# Altium PCB DUTBoard_DONT_TOUCH.PcbDoc (part 4 of 5)
Units mil, origin at the board's own origin, x right, y up, seen from the top; angles counter-clockwise.
Board outline 5475 x 5475 mil, 4 copper layers (Top Layer, Mid-Layer 1, Mid-Layer 2, Bottom Layer); 57 components, 471 nets, 1641 pads, 1070 vias.
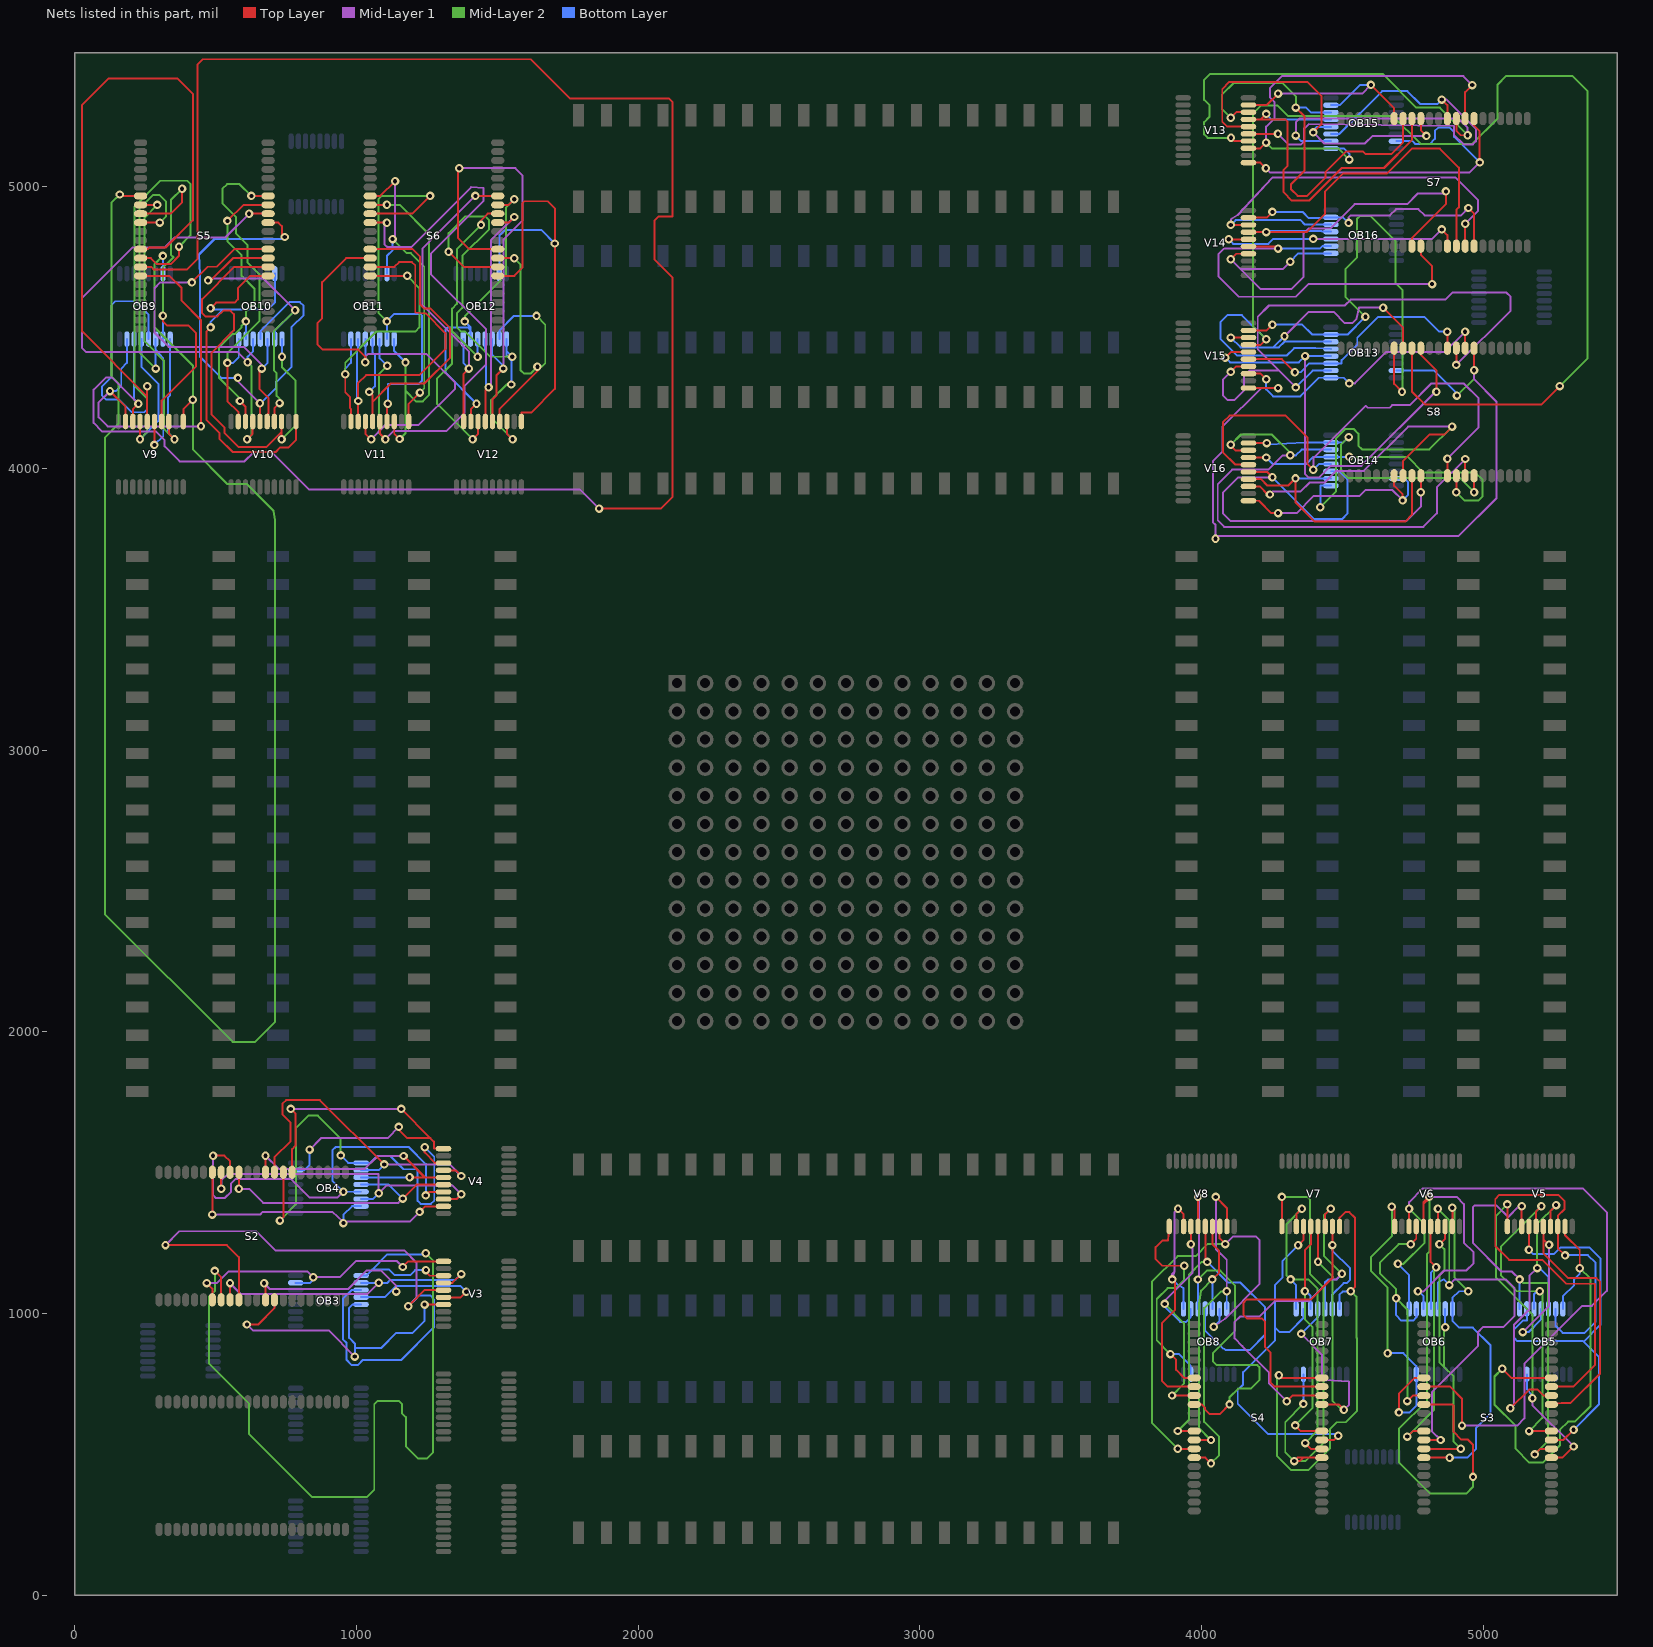
[diagram p6: the nets of this part, all layers, seen from the top]

## Via types
v1: diameter 30, hole 15, Top Layer to Bottom Layer, 1070 vias

## Nets (pads, with @x,y where several pads share a name; then routed paths per layer and width w, separated by ;. In a path a pad name is that pad's centre, name@x,y a point inside that pad or via, vN(x,y) a via of type N, cw(c..) or ccw(c..) an arc to the next point about the centre after c; other vN are vias at no path point) (continued)
OB_D_B2: OB16.D2 S7.DATA2 V14.OVL2 | length 1701.9
  Top Layer w7: v1(4103,4742) 4122.61,4761.61 V14.OVL2@4166.14,4761.61 ; S7.DATA2@4746.26,4788.62 4746.26,4816.76 4867,4937.5 v1(4867,4983)
  Mid-Layer 1 w7: v1(4103,4742) 4138,4707 ; v1(4314,4733.5) 4287.5,4707 4138,4707 ; v1(4867,4983) 4859,4975 4766,4975 4729,4938 4543,4938 4456,4851 4379,4851 4361,4833 4361,4678.5 4318.5,4636 4209,4636 4138,4707
  Bottom Layer w7: v1(4314,4733.5) 4343.52,4763.02 OB16.D2@4458.86,4763.02
OB_D_B3: OB16.D3 S7.DATA3 V14.OVL3 | length 1557
  Top Layer w7: V14.OVL3@4166.14,4787.2 4263.82,4787.2 v1(4271,4780.03) ; S7.DATA3@4777.76,4788.62 4777.76,4757.45 4817.76,4717.45 v1(4817.76,4654)
  Mid-Layer 1 w7: v1(4271,4780.03) 4079.03,4780.03 4059,4760 4059,4681 4131,4609 4334,4609 4379,4654 v1(4817.76,4654)
  Bottom Layer w7: v1(4271,4780.03) 4419.41,4780.03 4428,4788.61 OB16.D3@4458.86,4788.61
OB_D_B4: OB16.D4 S7.DATA4 V14.OVL4 | length 984.3
  Top Layer w7: v1(4096,4812.8) V14.OVL4@4166.14,4812.8 ; v1(4852.24,4848) 4872.24,4828 S7.DATA4@4872.24,4788.62
  Mid-Layer 1 w7: v1(4396.3,4814.2) 4818.45,4814.2 v1(4852.24,4848)
  Bottom Layer w7: v1(4096,4812.8) 4111.8,4797 4237,4797 4254.2,4814.2 v1(4396.3,4814.2) OB16.D4@4458.86,4814.2
OB_D_B5: OB16.D5 S7.DATA5 V14.OVL5 | length 1460.2
  Top Layer w7: V14.OVL5@4166.14,4838.39 v1(4229,4838.39) 4372.89,4838.39 4438,4903.5 4438,4983 4501.19,5046.19 4657.19,5046.19 4746,5135 4845.69,5135 4913,5067.69 4913,4926.45 4903.74,4917.19 S7.DATA5@4903.74,4788.62
  Bottom Layer w7: v1(4229,4838.39) 4233.61,4843 4424.5,4843 4427.71,4839.8 OB16.D5@4458.86,4839.8
OB_D_B6: OB16.D6 S7.DATA6 V14.OVL6 | length 1605
  Top Layer w7: v1(4103.58,4863.98) V14.OVL6@4166.14,4863.98 ; S7.DATA6@4935.24,4788.62 v1(4935.24,4868)
  Mid-Layer 1 w7: v1(4103.58,4863.98) 4103.58,4883.98 4128.92,4900 4251.11,5031.5 4901.26,5031.5 4980,4952.76 4980,4912.76 v1(4935.24,4868)
  Bottom Layer w7: v1(4103.58,4863.98) 4120.61,4881 4350.98,4881 4366.59,4865.39 OB16.D6@4458.86,4865.39
OB_D_B7: OB16.D7 S7.DATA7 V14.OVL7 | length 1003.3
  Top Layer w7: V14.OVL7@4166.14,4889.57 4230.57,4889.57 v1(4251,4910) ; v1(4946.73,4924) 4966.73,4904 S7.DATA7@4966.73,4788.62
  Mid-Layer 1 w7: v1(4521.42,4870.98) 4521.42,4890.98 4528.44,4898 4668,4898 4690,4920 4769.5,4920 4791.5,4898 4920.73,4898 v1(4946.73,4924)
  Bottom Layer w7: v1(4251,4910) 4357.8,4910 4379.8,4888 4424.73,4888 4427.71,4890.98 OB16.D7@4458.86,4890.98 4501.42,4890.98 v1(4521.42,4870.98)
OB_D_B8: OB15.D0 S7.DATA8 V13.OVL0 | length 1415
  Top Layer w7: V13.OVL0@4166.14,5084.84 4208,5084.84 v1(4227.84,5065) ; S7.DATA8@4966.73,5241.38 4966.73,5216.27 4986.73,5196.27 v1(4986.73,5085.73)
  Mid-Layer 1 w7: v1(4227.84,5065) 4242.34,5050.5 4951.5,5050.5 v1(4986.73,5085.73)
  Bottom Layer w7: OB15.D0@4691.14,5161.02 4749,5161.02 4759.02,5151 4809.5,5151 4828,5169.5 4828,5197.5 4840,5209.5 4880,5209.5 4895.9,5193.6 4895.9,5176.56 v1(4986.73,5085.73)
OB_D_B9: OB15.D1 S7.DATA9 V13.OVL1 | length 1575.6
  Top Layer w7: V13.OVL1@4166.14,5136.02 4208.7,5136.02 v1(4228.7,5156.02) ; S7.DATA9@4935.24,5241.38 4935.24,5335.51 v1(4960.24,5360.51)
  Mid-Layer 1 w7: v1(4228.7,5156.02) 4228.7,5212.7 4259,5243 4259,5300.07 4242,5317.07 4242,5349.48 4284.52,5392 4928.74,5392 v1(4960.24,5360.51)
  Mid-Layer 2 w7: v1(4228.7,5156.02) 4248.7,5136.02 4483.98,5136.02 v1(4524,5096)
  Bottom Layer w7: OB15.D1@4458.86,5135.43 4504.57,5135.43 4524,5116 v1(4524,5096)
OB_D_B10: OB15.D2 S7.DATA10 V13.OVL2 | length 2334.1
  Top Layer w7: v1(4104,5173) 4115.39,5161.61 V13.OVL2@4166.14,5161.61 ; S7.DATA10@4903.74,5241.38 4903.74,5198.52 4920,5182.26 v1(4943.74,5182.26)
  Mid-Layer 1 w7: v1(4334,5181) 4334,5228.02 4346.98,5241 4911.57,5241 4943.74,5208.83 v1(4943.74,5182.26)
  Mid-Layer 2 w7: v1(4104,5173) 4021,5173 4009,5185 4009,5229 4027,5247 4027,5290 4009,5308 4009,5379 4030,5400 4642.75,5400 4762.25,5280.5 4845.5,5280.5 v1(4943.74,5182.26)
  Bottom Layer w7: v1(4334,5181) 4353.98,5161.02 OB15.D2@4458.86,5161.02
OB_D_B11: OB15.D3 S7.DATA11 V13.OVL3 | length 1694.1
  Top Layer w7: V13.OVL3@4166.14,5187.2 v1(4270.8,5187.2) ; v1(4852.24,5309) 4872.24,5289 S7.DATA11@4872.24,5241.38
  Mid-Layer 1 w7: v1(4270.8,5187.2) 4307.85,5150.15 4353.15,5150.15 4364,5161 4364,5206 4380,5222 4895.5,5215.5 4895.5,5184.26 4929.76,5150 4962.24,5150 4973,5160.76 4973,5205.9 4869.9,5309 v1(4852.24,5309)
  Bottom Layer w7: OB15.D3@4458.86,5186.61 4487.98,5186.61 4640.37,5339 4730,5339 4775,5294 4837.24,5294 v1(4852.24,5309)
OB_D_B12: OB15.D4 S7.DATA12 V13.OVL4 | length 1315.6
  Top Layer w7: V13.OVL4@4166.14,5212.8 4090,5212.8 4073,5229.8 4073,5346.31 4098.58,5371.89 4375.11,5371.89 4425,5322 4425,5220.91 v1(4396.3,5192.2) ; S7.DATA12@4777.76,5241.38 4777.76,5200 v1(4797.76,5180)
  Mid-Layer 1 w7: v1(4396.3,5192.2) 4435.5,5153 4579.5,5153 4606.5,5180 v1(4797.76,5180)
  Bottom Layer w7: v1(4396.3,5192.2) 4396.3,5200 4408.5,5212.2 OB15.D4@4458.86,5212.2
OB_D_B13: OB15.D5 S7.DATA13 V13.OVL5 | length 1297.9
  Top Layer w7: V13.OVL5@4166.14,5238.39 4209.39,5238.39 ; v1(4229,5258) 4209.39,5238.39 ; S7.DATA13@4746.26,5241.38 4746.26,5165.07 4647.19,5066 4496.96,5066 4380.96,4950 4320.5,4950 4290.5,4980 4290.5,5059.42 4305,5073.92 4305,5230 4296.61,5238.39 4209.39,5238.39
  Bottom Layer w7: v1(4229,5258) 4249.2,5237.8 OB15.D5@4458.86,5237.8
OB_D_B14: OB15.D6 S7.DATA14 V13.OVL6 | length 1547.8
  Top Layer w7: v1(4103,5244) 4122.98,5263.98 V13.OVL6@4166.14,5263.98 ; v1(4334,5280.39) 4365,5249.39 4365,5056 4317,5008 4317,4990.5 4340.5,4967 4373.92,4967 4439.75,5032.84 4439.75,5052.06 4512.69,5125 4572.5,5125 4582.5,5115 4672.15,5115 4714.76,5157.61 S7.DATA14@4714.76,5241.38
  Mid-Layer 2 w7: v1(4103,5244) 4073,5274 4073,5327 4113,5367 4287,5367 4334,5320 v1(4334,5280.39)
  Bottom Layer w7: v1(4334,5280.39) 4334.39,5280 4371,5280 4387.61,5263.39 OB15.D6@4458.86,5263.39
OB_D_B15: OB15.D7 S7.DATA15 V13.OVL7 | length 789.9
  Top Layer w7: V13.OVL7@4166.14,5289.57 4230.57,5289.57 v1(4271,5330) ; v1(4600.87,5361) 4683.27,5278.6 S7.DATA15@4683.27,5241.38
  Mid-Layer 1 w7: v1(4271,5330) 4569.86,5330 v1(4600.87,5361)
  Bottom Layer w7: OB15.D7@4458.86,5288.98 4490.48,5288.98 4562.5,5361 v1(4600.87,5361)
OB_D_B16: OB14.D0 S8.DATA0 V16.OVL0 | length 835.2
  Top Layer w7: V16.OVL0@4166.14,3884.84 4203.52,3884.84 4247.37,3841 v1(4271,3841) ; S8.DATA0@4683.27,3973.62 4683.27,3937.5 4713,3907.77 v1(4713,3886)
  Mid-Layer 1 w7: v1(4271,3841) 4336.71,3841 4396.71,3901 4560,3901 4582.5,3923.5 4675.5,3923.5 v1(4713,3886)
  Bottom Layer w7: OB14.D0@4691.14,3964.02 4720,3964.02 4733,3951.02 4733,3906 v1(4713,3886)
OB_D_B17: OB14.D1 S8.DATA1 V16.OVL1 | length 2009
  Top Layer w7: V16.OVL1@4166.14,3936.02 4205.5,3936.02 4234.52,3907 v1(4242.02,3907) ; S8.DATA1@4714.76,3973.62 4714.76,4026.76 4807.74,4119.74 4860.74,4119.74 v1(4889,4148)
  Mid-Layer 1 w7: v1(4242.02,3907) 4252.02,3917 4350.3,3917 4383,3949.7 4437,3949.7 4478.3,3991 4576,3991 4733,4148 v1(4889,4148)
  Mid-Layer 2 w7: v1(4421,3862) 4477,3918 4477,4106.5 4510,4139.5 4540,4139.5 4556,4123.5 4556,4080 4569,4067 4808,4067 v1(4889,4148)
  Bottom Layer w7: v1(4421,3862) 4421,3938.43 OB14.D1@4458.86,3938.43
OB_D_B18: OB14.D2 S8.DATA2 V16.OVL2 | length 986.7
  Top Layer w7: V16.OVL2@4166.14,3961.61 4210.89,3961.61 4233.5,3939 4307.98,3939 v1(4333,3964.02) 4333,3880 4402,3811 4722,3811 4746.26,3835.26 S8.DATA2@4746.26,3973.62
  Bottom Layer w7: v1(4333,3964.02) OB14.D2@4458.86,3964.02
OB_D_B19: OB14.D3 S8.DATA3 V16.OVL3 | length 1738.4
  Top Layer w7: V16.OVL3@4166.14,3987.2 4231.8,3987.2 v1(4251,3968) ; v1(4777.76,3915) S8.DATA3@4777.76,3973.62
  Mid-Layer 1 w7: v1(4251,3968) 4129,3968 4075,3914 4075,3840 4102.5,3812.5 4726.5,3812.5 4777.76,3863.76 v1(4777.76,3915)
  Bottom Layer w7: v1(4251,3968) 4399,3820 4498,3820 4518,3840 4518,3960 4488.39,3989.61 OB14.D3@4458.86,3989.61
OB_D_B20: OB14.D4 S8.DATA4 V16.OVL4 | length 1864.4
  Top Layer w7: V16.OVL4@4166.14,4012.8 4120,4012.8 4075,4057.8 4075,4163 4099,4187 4298,4187 4375,4110 4375,4016.5 v1(4396.3,3995.2) ; S8.DATA4@4872.24,3973.62 v1(4872.24,4034.24)
  Mid-Layer 1 w7: v1(4396.3,3995.2) 4396.3,4035.2 4583.09,4222 4590.1,4215 4667.1,4215 4676.1,4224 4738.52,4224 4815.52,4301 4930,4301 4983,4248 4983,4145 v1(4872.24,4034.24)
  Bottom Layer w7: OB14.D4@4458.86,4015.2 4416.3,4015.2 ; 4416.3,4015.2 v1(4396.3,3995.2) 4416.3,4015.2
OB_D_B21: OB14.D5 S8.DATA5 V16.OVL5 | length 1113.2
  Top Layer w7: V16.OVL5@4166.14,4038.39 v1(4229,4038.39) ; v1(4903.74,3915) S8.DATA5@4903.74,3973.62
  Mid-Layer 2 w7: v1(4523.74,4040.8) 4730.77,4040.8 4786.57,3985 4971,3985 4997,3959 4997,3901 4981,3885 4933.74,3885 v1(4903.74,3915)
  Bottom Layer w7: v1(4229,4038.39) 4251.39,4016 4372,4016 4396.8,4040.8 OB14.D5@4458.86,4040.8 v1(4523.74,4040.8)
OB_D_B22: OB14.D6 S8.DATA6 V16.OVL6 | length 2017.1
  Top Layer w7: v1(4103.58,4083.98) 4103.58,4080 4119.61,4063.98 V16.OVL6@4166.14,4063.98 ; S8.DATA6@4935.24,3973.62 v1(4935.24,4033)
  Mid-Layer 1 w7: v1(4314,4046) 4288,4046 4237,3995 4108.31,3995 4057,3943.69 4057,3815 4080,3792 4787,3792 4835,3840 4835,3932.76 v1(4935.24,4033)
  Mid-Layer 2 w7: v1(4103.58,4083.98) 4139.61,4120 4249,4120 4314,4055 v1(4314,4046)
  Bottom Layer w7: v1(4314,4046) 4334,4046 4354.39,4066.39 OB14.D6@4458.86,4066.39
OB_D_B23: OB14.D7 S8.DATA7 V16.OVL7 | length 1060.5
  Top Layer w7: V16.OVL7@4166.14,4089.57 v1(4231,4089.57) ; S8.DATA7@4966.73,3973.62 4966.73,3915.27 v1(4967,3915)
  Mid-Layer 2 w7: v1(4522,4111) 4494,4083 4494,3992 4521,3965 4917,3965 v1(4967,3915)
  Bottom Layer w7: v1(4231,4089.57) 4236.57,4084 4366.98,4091.98 OB14.D7@4458.86,4091.98 4502.98,4091.98 v1(4522,4111)
OB_D_B24: OB13.D0 S8.DATA8 V15.OVL0 | length 2768
  Top Layer w7: V15.OVL0@4166.14,4284.84 v1(4271.02,4284.84) ; v1(4966.73,4347.76) S8.DATA8@4966.73,4426.38
  Mid-Layer 1 w7: v1(4271.02,4284.84) 4210.84,4284.84 4073,4147 4073,4058 4040,4025 4040,3807.96 4049,3798.96 v1(4049,3750) 4059,3760 4912,3760 5046.5,3894.5 5046.5,4236.5 4966.73,4316.27 v1(4966.73,4347.76)
  Mid-Layer 2 w7: v1(4906,4258) 4966.73,4318.73 v1(4966.73,4347.76)
  Bottom Layer w7: OB13.D0@4691.14,4347.02 4824.98,4347.02 4906,4266 v1(4906,4258)
OB_D_B25: OB13.D1 S8.DATA9 V15.OVL1 | length 993.9
  Top Layer w7: V15.OVL1@4166.14,4336.02 4208.98,4336.02 v1(4229,4316) ; v1(4935,4485) 4935.24,4484.76 S8.DATA9@4935.24,4426.38
  Mid-Layer 1 w7: v1(4523.84,4301.43) 4543.84,4301.43 4655.41,4413 4863,4413 v1(4935,4485)
  Bottom Layer w7: v1(4229,4316) 4229,4280 4253.75,4255.25 4350,4255.25 4416.18,4321.43 OB13.D1@4458.86,4321.43 4503.84,4321.43 v1(4523.84,4301.43)
OB_D_B26: OB13.D2 S8.DATA10 V15.OVL2 | length 2308.7
  Top Layer w7: v1(4103,4342) 4122.61,4361.61 V15.OVL2@4166.14,4361.61 ; S8.DATA10@4903.74,4426.38 4903.74,4367.26 v1(4904,4367)
  Mid-Layer 1 w7: v1(4103,4342) 4075.08,4314.08 4075.08,4258.63 4091.78,4241.93 4115.39,4241.93 4151,4277.55 4151,4328 4171,4348 4273,4348 v1(4334,4287) 4199,4422 4199,4538 4239,4578 4508,4578 4528.5,4598.5 4864.48,4598.5 4889.98,4624 5082,4624 5097,4609 5097,4560 v1(4904,4367)
  Bottom Layer w7: v1(4334,4287) 4394.02,4347.02 OB13.D2@4458.86,4347.02
OB_D_B27: OB13.D3 S8.DATA11 V15.OVL3 | length 907.8
  Top Layer w7: V15.OVL3@4166.14,4387.2 4284.8,4387.2 v1(4331,4341) ; v1(4872,4485) 4872.24,4484.76 S8.DATA11@4872.24,4426.38
  Bottom Layer w7: v1(4331,4341) 4350.93,4341 4382.55,4372.61 OB13.D3@4458.86,4372.61 4497,4372.61 4497,4384 4552.18,4439.18 4552.18,4463.18 4626.76,4537.76 4790.28,4537.76 4843.04,4485 v1(4872,4485)
OB_D_B28: OB13.D4 S8.DATA12 V15.OVL4 | length 1675.1
  Top Layer w7: v1(4084,4393) 4103.8,4412.8 V15.OVL4@4166.14,4412.8 ; S8.DATA12@4777.76,4426.38 4777.76,4402.74 4833.02,4347.48 v1(4833.02,4272)
  Mid-Layer 1 w7: v1(4367,4398.2) 4367,3979.7 4380,3966.7 4415.47,3966.7 4457.76,4009 4567,4009 4830,4272 v1(4833.02,4272)
  Bottom Layer w7: v1(4084,4393) 4101,4376 4344.8,4376 v1(4367,4398.2) OB13.D4@4458.86,4398.2
OB_D_B29: OB13.D5 S8.DATA13 V15.OVL5 | length 4848.7
  Top Layer w7: V15.OVL5@4166.14,4438.39 4209.39,4438.39 v1(4229,4458) ; S8.DATA13@4746.26,4426.38 4746.26,4272.74 4793,4226 5205,4226 v1(5271,4292)
  Mid-Layer 2 w7: v1(4229,4458) 4182,4505 4182,5259 4211,5288 4269,5288 4307,5250 4679,5250 4777.5,5151.5 4960,5151.5 5050,5241.5 5050,5362 5080,5392 5317,5392 5370,5339 5370,4391 v1(5271,4292)
  Bottom Layer w7: v1(4229,4458) 4143,4544 4091.5,4544 4067.5,4520 4067.5,4458.5 4126,4400 4301.09,4400 4328.09,4427 4404.5,4427 OB13.D5@4458.86,4423.8
OB_D_B30: OB13.D6 S8.DATA14 V15.OVL6 | length 1110.7
  Top Layer w7: v1(4103,4464) V15.OVL6@4166.14,4463.98 ; v1(4644,4570) 4714.76,4499.24 S8.DATA14@4714.76,4426.38
  Mid-Layer 1 w7: v1(4294,4469) 4380,4555 4468,4555 4507.26,4515.74 4534.74,4515.74 4550,4531 4559,4570 v1(4644,4570)
  Bottom Layer w7: v1(4103,4464) 4138,4429 4254,4429 ; v1(4294,4469) 4254,4429 ; OB13.D6@4458.86,4449.39 4294,4449.39 4273.61,4429 4254,4429
OB_D_B31: OB13.D7 S8.DATA15 V15.OVL7 | length 1746.6
  Top Layer w7: V15.OVL7@4166.14,4489.57 4230.57,4489.57 v1(4251,4510) ; S8.DATA15@4683.27,4426.38 4683.27,4299.73 v1(4711,4272)
  Mid-Layer 2 w7: v1(4581,4538) 4511,4608 4511,4708 4551,4748 4551,4885 4561,4895 4600,4895 4688.5,4806.5 4688.5,4657.5 4713.5,4632.5 4713.5,4274.5 v1(4711,4272)
  Bottom Layer w7: v1(4251,4510) 4356.91,4510 4391.93,4474.98 OB13.D7@4458.86,4474.98 4517.98,4474.98 v1(4581,4538)
OB_D_B32: OB12.D0 S6.DATA0 V12.OVL0 | length 1642.6
  Top Layer w7: S6.DATA0@1501.38,4683.27 1560,4683.27 1590,4713.27 1590,4942 1596,4948 1679,4948 1704,4923 v1(1704,4798) 1704,4282.02 1620,4198.02 1585.16,4198.02 V12.OVL0@1585.16,4166.14
  Bottom Layer w7: OB12.D0@1506.98,4691.14 1506.98,4824.98 1528,4846 1656,4846 v1(1704,4798)
OB_D_B33: OB12.D1 S6.DATA1 V12.OVL1 | length 1637.7
  Top Layer w7: v1(1327,4769) 1381.24,4714.76 S6.DATA1@1501.38,4714.76 ; V12.OVL1@1533.98,4166.14 1533.98,4123.07 v1(1554,4103.05)
  Mid-Layer 2 w7: v1(1327,4769) 1327,4835 1386,4894 1457,4894 1471,4880 1471,4848.83 1376,4753.83 1376,4569.8 1356.11,4549.92 1356.11,4500 1369.73,4486.39 1384.61,4486.39 1475,4396 1532.57,4396.3 v1(1552.57,4396.3) ; v1(1549.5,4297.57) 1532.57,4297.57 1478,4243 1478,4179.05 v1(1554,4103.05)
  Bottom Layer w7: OB12.D1@1532.57,4458.86 1532.57,4416.3 ; v1(1549.5,4297.57) 1549.5,4382.5 1532.57,4399.43 1532.57,4416.3 ; v1(1552.57,4396.3) 1532.57,4416.3
OB_D_B34: OB12.D2 S6.DATA2 V12.OVL2 | length 1186.4
  Top Layer w7: S6.DATA2@1501.38,4746.26 1559.74,4746.26 v1(1560,4746) ; V12.OVL2@1508.39,4166.14 1508.39,4211.07 1645,4347.68 v1@1645,4358
  Mid-Layer 2 w7: v1(1560,4746) 1582,4724 1582,4349 1595,4336 1617.59,4336 v1(1642.3,4360.7) 1658.02,4360.7 1670,4372.68 1670,4509.87 v1(1639,4540.87)
  Bottom Layer w7: OB12.D2@1506.98,4458.86 1506.98,4488.84 1559,4540.87 v1(1639,4540.87)
OB_D_B35: OB12.D3 S6.DATA3 V12.OVL3 | length 1682.5
  Top Layer w7: v1(1365,5065.36) 1360,5060.36 1360,4817.76 1400,4777.76 S6.DATA3@1501.38,4777.76 ; V12.OVL3@1482.8,4166.14 1482.8,4244.8 1497.5,4259.5 1497.5,4299.81 1497,4300.31 1497,4330 v1(1521,4354)
  Mid-Layer 1 w7: v1(1365,5065.36) 1563.64,5065.36 1590,5039 1590,4881 1521,4812 v1(1521,4354)
  Bottom Layer w7: OB12.D3@1481.39,4458.86 1481.39,4403.61 1521,4364 v1(1521,4354)
OB_D_B36: OB12.D4 S6.DATA4 V12.OVL4 | length 1011.6
  Top Layer w7: V12.OVL4@1457.2,4166.14 1457.2,4276.2 v1(1469,4288) ; S6.DATA4@1501.38,4872.24 1540.24,4872.24 v1(1560,4892)
  Mid-Layer 1 w7: v1(1469,4288) 1477,4296 1477,4809 v1(1560,4892)
  Bottom Layer w7: OB12.D4@1455.8,4458.86 1455.8,4414 1460,4409.8 1460,4297 v1(1469,4288)
OB_D_B37: OB12.D5 S6.DATA5 V12.OVL5 | length 1225.7
  Top Layer w7: v1(1412,4103) 1431.61,4122.61 V12.OVL5@1431.61,4166.14 ; v1(1442,4864) 1442,4880 1465.74,4903.74 S6.DATA5@1501.38,4903.74
  Mid-Layer 2 w7: v1(1412,4103) 1286,4229 1286,4319 1339.11,4372.11 1339.11,4486.79 ; v1(1429.9,4396) 1339.11,4486.79 ; v1(1442,4864) 1356,4778 1356,4583.8 1339.11,4566.92 1339.11,4486.79
  Bottom Layer w7: v1(1429.9,4396) 1430.2,4396.3 OB12.D5@1430.2,4458.86
OB_D_B38: OB12.D6 S6.DATA6 V12.OVL6 | length 1120
  Top Layer w7: V12.OVL6@1406.02,4166.14 1406.02,4209.02 v1(1426,4229) ; S6.DATA6@1501.38,4935.24 1540.24,4935.24 v1(1560,4955)
  Mid-Layer 2 w7: v1(1384.61,4521.42) 1384.61,4540 1531,4686.39 1531,4926 v1(1560,4955)
  Bottom Layer w7: v1(1384.61,4521.42) 1404.61,4501.42 1404.61,4490 ; OB12.D6@1404.61,4458.86 1404.61,4490 ; v1(1426,4229) 1316,4339 1316,4492.61 1323.39,4500 1394.61,4500 1404.61,4490
OB_D_B39: OB12.D7 S6.DATA7 V12.OVL7 | length 1147.1
  Top Layer w7: V12.OVL7@1380.43,4166.14 1380.43,4335.39 v1(1399.02,4353.98) ; v1(1422,4966.73) S6.DATA7@1501.38,4966.73
  Mid-Layer 1 w7: v1(1399.02,4353.98) 1399.02,4415.49 1234.01,4580.5 1234.01,4778.74 v1(1422,4966.73)
  Bottom Layer w7: OB12.D7@1379.02,4458.86 1379.02,4373.98 v1(1399.02,4353.98)
OB_D_B40: OB11.D0 S6.DATA8 V11.OVL0 | length 1175.7
  Top Layer w7: S6.DATA8@1048.62,4966.73 1084.73,4966.73 v1(1137,5019) ; V11.OVL0@1185.16,4166.14 1185.16,4229.16 v1(1225,4269)
  Mid-Layer 1 w7: v1(1127.98,4813.7) 1137,4822.73 v1(1137,5019)
  Mid-Layer 2 w7: v1(1127.98,4813.7) 1178.17,4763.5 1193.02,4763.5 1240.5,4716.02 1240.5,4284.5 v1(1225,4269)
  Bottom Layer w7: OB11.D0@1107.98,4691.14 1107.98,4753.7 1127.98,4773.7 v1(1127.98,4813.7)
OB_D_B41: OB11.D1 S6.DATA9 V11.OVL1 | length 1381.4
  Top Layer w7: S6.DATA9@1048.62,4935.24 v1(1108,4935.24) ; V11.OVL1@1133.98,4166.14 1133.98,4123.02 v1(1153,4104)
  Mid-Layer 2 w7: v1(1108,4935.24) 1152.76,4935.24 1258,4830 1258,4260.5 1235.5,4238 1211,4238 1174,4275 ; v1(1153,4104) 1174,4125 1174,4275 ; v1(1174,4376) 1174,4275
  Bottom Layer w7: OB11.D1@1133.57,4458.86 1133.57,4416.43 v1(1174,4376)
OB_D_B42: OB11.D2 S6.DATA10 V11.OVL2 | length 1565.4
  Top Layer w7: S6.DATA10@1048.62,4903.74 1197.96,4903.74 v1(1261.22,4967) ; V11.OVL2@1108.39,4166.14 1108.39,4226.32 v1(1111.07,4229)
  Mid-Layer 2 w7: v1(1107.98,4521.42) 1078,4551.39 1078,4955 1090,4967 v1(1261.22,4967)
  Bottom Layer w7: OB11.D2@1107.98,4458.86 v1(1107.98,4521.42) 1134.78,4548.22 1226.4,4548.22 1232,4542.61 1232,4310 1221.53,4299.53 1111.07,4299.53 v1(1111.07,4229)
OB_D_B43: OB11.D3 S6.DATA11 V11.OVL3 | length 2351.6
  Top Layer w7: S6.DATA11@1048.62,4872.24 1107.76,4872.24 v1(1108,4872) ; V11.OVL3@1082.8,4166.14 1082.8,4123.58 v1(1102.8,4103.58)
  Mid-Layer 1 w7: v1(1102.8,4103.58) 1132.21,4133 1320,4133 1384,4197 1384,4293 1460,4369 1460,4493.5 1264,4689.5 1264,4762.23 1451,4949.23 1451,4995.5 1407,4998 1194,4785 1110,4785 1099,4796 1099,4863 v1(1108,4872)
  Mid-Layer 2 w7: v1(1102.8,4103.58) 1079.5,4126.88 1079.5,4334.5 v1(1109,4364)
  Bottom Layer w7: OB11.D3@1082.39,4458.86 1082.39,4390.61 v1(1109,4364)
OB_D_B44: OB11.D4 S6.DATA12 V11.OVL4 | length 1253.2
  Top Layer w7: v1(1045,4271) 1057.2,4258.8 1057.2,4236.78 ; S6.DATA12@1048.62,4777.76 1199.33,4777.76 1226,4751.09 1226,4581.5 1239.5,4568 1261.37,4568 1332.5,4496.87 1332.5,4392.5 1241,4301 1121.43,4301 1057.2,4236.78 ; V11.OVL4@1057.2,4166.14 1057.2,4236.78
  Bottom Layer w7: v1(1045,4271) 1065,4291 1065,4402.8 1056.8,4411 OB11.D4@1056.8,4458.86
OB_D_B45: OB11.D5 S6.DATA13 V11.OVL5 | length 1574.6
  Top Layer w7: v1(1031.2,4376.3) 1031.2,4396.3 1006.55,4420.95 880,4420.95 861,4439.95 861,4515 878,4532 878,4661.26 963,4746.26 S6.DATA13@1048.62,4746.26 ; V11.OVL5@1031.61,4166.14 1031.61,4123.39 v1(1052,4103)
  Mid-Layer 1 w7: v1(1031.2,4376.3) 1031.2,4396.3 1040.91,4406 1247,4406 1350,4303 1350,4283 1221,4154 1103,4154 v1(1052,4103)
  Bottom Layer w7: v1(1031.2,4376.3) OB11.D5@1031.2,4458.86
OB_D_B46: OB11.D6 S6.DATA14 V11.OVL6 | length 1252
  Top Layer w7: V11.OVL6@1006.02,4166.14 v1(1006,4238.98) 1006.02,4303.02 1033.8,4330.8 1223.43,4330.8 1315.5,4422.87 1315.5,4479.87 1245.37,4550 1208.5,4552.88 1208.5,4720 1196.73,4731.77 1151.5,4731.77 1134.5,4714.76 S6.DATA14@1048.62,4714.76
  Bottom Layer w7: OB11.D6@1005.61,4458.86 1005.61,4420.61 1001,4416 1001,4243.98 v1(1006,4238.98)
OB_D_B47: OB11.D7 S6.DATA15 V11.OVL7 | length 998.4
  Top Layer w7: v1(960.02,4333.98) 960.02,4269.89 977.5,4252.41 977.5,4213.41 980.43,4210.48 V11.OVL7@980.43,4166.14 ; S6.DATA15@1048.62,4683.27 v1(1180,4683.27)
  Mid-Layer 2 w7: v1(960.02,4333.98) 960.02,4375.02 1071,4486 1209.5,4486 1223.5,4500 1223.5,4639.77 v1(1180,4683.27)
  Bottom Layer w7: v1(960.02,4333.98) 960.02,4353.98 980.02,4373.98 OB11.D7@980.02,4458.86
OB_D_B48: OB10.D0 S5.DATA0 V10.OVL0 | length 1494.7
  Top Layer w7: v1(482,4500) 468,4486 468,4171 513,4126 513,4104.89 560,4057.89 712.89,4057.89 729,4074 759.16,4074 785.16,4100 V10.OVL0@785.16,4166.14 ; v1(482,4568) 502,4588 567.5,4588 579,4599.5 579,4639.5 622.77,4683.27 S5.DATA0@686.38,4683.27
  Bottom Layer w7: v1(482,4500) 482,4520 525,4563 ; v1(482,4568) 487,4563 525,4563 ; OB10.D0@709.98,4691.14 709.98,4588 684.98,4563 525,4563
OB_D_B49: OB10.D1 S5.DATA1 V10.OVL1 | length 1643
  Top Layer w7: S5.DATA1@686.38,4714.76 566.26,4714.76 452,4600.5 452,4550.52 463.52,4539 506.5,4539 527.5,4560 552.5,4560 565,4547.5 565,4490 486,4411 486,4190.5 531,4145.5 531,4125.99 582.1,4074.89 678.86,4074.89 733.98,4130 ; v1(734,4103) 733.98,4130 ; V10.OVL1@733.98,4166.14 733.98,4130
  Mid-Layer 2 w7: v1(734,4103) 784,4153 784,4311.05 735.57,4359.48 v1(735.57,4396)
  Bottom Layer w7: v1(735.57,4396) OB10.D1@735.57,4458.86
OB_D_B50: OB10.D2 S5.DATA2 V10.OVL2 | length 1177.7
  Top Layer w7: v1(473,4667) 482.43,4667 561.69,4746.26 S5.DATA2@686.38,4746.26 ; V10.OVL2@708.39,4166.14 708.39,4213 v1(727,4231.61)
  Mid-Layer 1 w7: v1(473,4667) 479,4673 669.87,4673 v1(782,4560.87)
  Mid-Layer 2 w7: v1(727,4231.61) 727,4247 716.5,4257.5 716.5,4338.07 707.07,4347.5 707.07,4485.93 v1(782,4560.87)
  Bottom Layer w7: OB10.D2@709.98,4458.86 709.98,4488.84 v1(782,4560.87)
OB_D_B51: OB10.D3 S5.DATA3 V10.OVL3 | length 1379.1
  Top Layer w7: v1(416,4660) 471.5,4715.5 504.62,4715.5 566.87,4777.76 S5.DATA3@686.38,4777.76 ; v1(664,4354) 656,4346 656,4281 687,4250 687,4195.2 682.8,4191 V10.OVL3@682.8,4166.14
  Mid-Layer 1 w7: v1(416,4660) 304,4660 283,4639 283,4481 333,4431 600,4431 664,4367 v1(664,4354)
  Bottom Layer w7: v1(664,4354) 684.39,4374.39 OB10.D3@684.39,4458.86
OB_D_B52: OB10.D4 S5.DATA4 V10.OVL4 | length 1783.9
  Top Layer w7: v1(657,4231) 657.2,4230.8 V10.OVL4@657.2,4166.14 ; S5.DATA4@686.38,4872.24 722.76,4872.24 735,4860 735,4831 v1(745,4821)
  Mid-Layer 1 w7: v1(579,4321) 579,4309 v1(657,4231)
  Bottom Layer w7: v1(579,4321) 520,4321 444.5,4396.5 444.5,4689 441,4759 496,4814 738,4814 v1(745,4821) ; v1(657,4231) 660.5,4231 715,4285.5 715,4306 770,4361 770,4502 812,4544 812,4577.37 799.37,4590 761.87,4590 658.8,4486.93 OB10.D4@658.8,4458.86
OB_D_B53: OB10.D5 S5.DATA5 V10.OVL5 | length 2018.3
  Top Layer w7: v1(611.61,4103.39) 631.61,4123.39 V10.OVL5@631.61,4166.14 ; v1(618.74,4903.74) S5.DATA5@686.38,4903.74
  Mid-Layer 1 w7: v1(613.2,4376.3) 576.14,4413.37 39.24,4413.37 26,4426.6 26,4605 205,4784 319.15,4784 355.17,4820.02 535.02,4820.02 v1(618.74,4903.74)
  Mid-Layer 2 w7: v1(611.61,4103.39) 628,4119.77 628,4361.5 v1(613.2,4376.3)
  Bottom Layer w7: v1(613.2,4376.3) 613.2,4396.3 633.2,4416.3 OB10.D5@633.2,4458.86
OB_D_B54: OB10.D6 S5.DATA6 V10.OVL6 | length 1078.9
  Top Layer w7: v1(542,4878) 599.24,4935.24 S5.DATA6@686.38,4935.24 ; v1(586.02,4239) 606.02,4219 V10.OVL6@606.02,4166.14
  Mid-Layer 2 w7: v1(542,4878) 542,4805.86 592,4755.86 592,4683 638,4637 638,4586 607.61,4555.61 v1(607.61,4521.42) 592.33,4506.14 592.33,4500 568.33,4476 559,4476 512,4429 512,4321.93 586.02,4247.91 v1(586.02,4239)
  Bottom Layer w7: OB10.D6@607.61,4458.86 v1(607.61,4521.42)
OB_D_B55: OB10.D7 S5.DATA7 V10.OVL7 | length 1242.9
  Top Layer w7: v1(542.02,4373.98) 542.02,4238.48 580.43,4200.07 V10.OVL7@580.43,4166.14 ; v1(627,4966.73) S5.DATA7@686.38,4966.73
  Mid-Layer 2 w7: v1(542.02,4373.98) 542.02,4409.02 655,4522 655,4689 613,4731 613,4793 572,4834 572,4893 524,4941 524,4992 541,5009 584.73,5009 v1(627,4966.73)
  Bottom Layer w7: v1(542.02,4373.98) 562.02,4373.98 582.02,4393.98 OB10.D7@582.02,4458.86
OB_D_B56: OB9.D0 S5.DATA8 V9.OVL0 | length 6595.4
  Top Layer w7: v1(160,4972) 165.27,4966.73 S5.DATA8@233.62,4966.73 ; V9.OVL0@385.16,4166.14 385.16,4209.16 v1(419,4243)
  Mid-Layer 2 w7: v1(160,4972) 130,4942 130,4327 155,4302 155,4157.3 106.5,4108.8 106.5,2417.5 560,1964 640,1964 711,2035 711,3816.98 705.48,3848.52 609.69,3944.31 541.69,3944.31 419,4067 v1(419,4243) 419,4365 283,4501 283,4724 v1(313,4754)
  Bottom Layer w7: OB9.D0@312.98,4691.14 v1(313,4754)
OB_D_B57: OB9.D1 S5.DATA9 V9.OVL1 | length 1393.9
  Top Layer w7: S5.DATA9@233.62,4935.24 292.76,4935.24 v1(293,4935) ; V9.OVL1@333.98,4166.14 333.98,4123.02 v1(354,4103)
  Mid-Layer 2 w7: v1(293,4935) 248,4890 248,4450.36 316,4382.36 316,4141 v1(354,4103)
  Bottom Layer w7: OB9.D1@338.57,4458.86 338.57,4259.52 331.07,4252.03 331.07,4125.93 v1(354,4103)
OB_D_B58: OB9.D2 S5.DATA10 V9.OVL2 | length 1300.8
  Top Layer w7: S5.DATA10@233.62,4903.74 341,4903.74 381,4943.74 v1(381,4992.24) ; V9.OVL2@308.39,4166.14 308.39,4240.39 430.5,4362.5 430.5,4480 404,4506.5 327.89,4506.5 312.98,4521.42 v1(312.98,4541.42)
  Mid-Layer 2 w7: v1(312.98,4541.42) 312.98,4711.67 350.5,4749.19 341.19,4758.5 341.19,4952.43 v1(381,4992.24)
  Bottom Layer w7: OB9.D2@312.98,4458.86 v1(312.98,4541.42)
OB_D_B59: OB9.D3 S5.DATA11 V9.OVL3 | length 1416
  Top Layer w7: S5.DATA11@233.62,4872.24 v1(302,4872.24) ; v1(282.8,4083) V9.OVL3@282.8,4166.14
  Mid-Layer 2 w7: v1(287.39,4353.98) 230.48,4410.89 230.48,4923.48 277,4970 301,4970 323,4948 323,4893.24 v1(302,4872.24)
  Bottom Layer w7: v1(282.8,4083) 314.07,4114.27 314.07,4390.32 287.39,4421.3 ; v1(287.39,4353.98) 287.39,4421.3 ; OB9.D3@287.39,4458.86 287.39,4421.3
OB_D_B60: OB9.D4 S5.DATA12 V9.OVL4 | length 3236.5
  Top Layer w7: S5.DATA12@233.62,4777.76 258.76,4777.76 264,4783 322,4783 419,4880 419,5329 364,5384 120,5384 26,5290 26,4486 257.2,4254.8 ; v1(257,4290.98) 257.2,4290.78 257.2,4254.8 ; V9.OVL4@257.2,4166.14 257.2,4254.8
  Bottom Layer w7: v1(257,4290.98) 257,4210 246,4199 202,4199 156,4245 110.48,4245 96,4259.48 96,4289.48 130,4323.48 130,4579.07 143.93,4593 214.24,4593 261.8,4545.45 OB9.D4@261.8,4458.86
OB_D_B61: OB9.D5 S5.DATA13 V9.OVL5 | length 1995
  Top Layer w7: v1(231.61,4103) V9.OVL5@231.61,4166.14 ; S5.DATA13@233.62,4746.26 269.74,4746.26 291,4725 340,4725 370,4755 v1(370,4787)
  Mid-Layer 2 w7: v1(231.61,4103) 256,4127.39 256,4249 212,4293 212,4929.04 303.7,5020.74 398.76,5020.74 410,5009.5 410,4827 v1(370,4787)
  Bottom Layer w7: v1(231.61,4103) 297,4168.39 297,4300 236.2,4360.8 OB9.D5@236.2,4458.86
OB_D_B62: OB9.D6 S5.DATA14 V9.OVL6 | length 7030.7
  Top Layer w7: V9.OVL6@206.02,4166.14 206.02,4209.02 v1(226,4229) ; S5.DATA14@233.62,4714.76 271,4714.76 280.76,4705 397,4705 436,4744 436,5434 454,5452 1618,5452 1758,5312 2110,5312 2122,5300 2122,4893.31 2071.31,4893.31 2058,4880 2058,4741 2121,4678 2121,3898 2080,3857 v1(1861,3857)
  Mid-Layer 1 w7: v1(226,4229) 133,4322 110,4322 67,4279 67,4161 96.5,4131.5 287.5,4131.5 319,4100 319,4078 372,4025 602.5,4025 635,4057.5 699.5,4057.5 833,3924 1794,3924 v1(1861,3857)
  Bottom Layer w7: OB9.D6@210.61,4458.86 210.61,4244.39 v1(226,4229)
OB_D_B63: OB9.D7 S5.DATA15 V9.OVL7 | length 1520.9
  Top Layer w7: v1(125.02,4273.98) 180.43,4218.57 V9.OVL7@180.43,4166.14 ; S5.DATA15@233.62,4683.27 335.73,4683.27 379,4640 379,4595 448,4526 v1(448,4149)
  Mid-Layer 1 w7: v1(125.02,4273.98) 85,4233.95 85,4181 117,4149 v1(448,4149)
  Bottom Layer w7: v1(125.02,4273.98) 145.02,4273.98 165.02,4293.98 165.02,4353.98 185.02,4373.98 OB9.D7@185.02,4458.86
OB_D_B64: OB8.D0 S4.DATA0 V8.OVL0 | length 909.5
  Top Layer w7: V8.OVL0@3884.84,1308.86 3880.79,1258.86 3860,1258.86 3836.46,1235.32 3836.46,1193.07 3860,1169.52 v1(3938,1169.52) ; v1(3889,856) 3909,836 3909,800 3937.27,771.73 S4.DATA0@3973.62,771.73
  Mid-Layer 2 w7: v1(3889,856) 3840.5,904.5 3840.5,1051.5 3879,1090 3908,1090 3938,1120 v1(3938,1169.52)
  Bottom Layer w7: v1(3889,856) 3920,856 3961.02,814.98 OB8.D0@3961.02,783.86
OB_D_B65: OB8.D1 S4.DATA1 V8.OVL1 | length 992.7
  Top Layer w7: v1(3895.43,1121.02) 3906,1110.46 3906,1013 3859,966 3859,761.24 3880,740.24 S4.DATA1@3973.62,740.24 ; v1(3916,1372) 3936.02,1351.98 V8.OVL1@3936.02,1308.86
  Mid-Layer 1 w7: v1(3916,1372) 3904,1360 3904,1149.59 ; 3904,1149.59 v1(3895.43,1121.02) 3895.43,1141.02 3904,1149.59
  Bottom Layer w7: v1(3895.43,1121.02) 3916.46,1100 3935.43,1090 OB8.D1@3935.43,1016.14
OB_D_B66: OB8.D2 S4.DATA2 V8.OVL2 | length 928.8
  Top Layer w7: v1(3895,709) 3915,709 S4.DATA2@3973.62,708.74 ; v1(3961.61,1246) V8.OVL2@3961.61,1308.86
  Mid-Layer 1 w7: v1(3869,1034.13) 3869,1045 3968,1144 3968,1239.61 v1(3961.61,1246)
  Mid-Layer 2 w7: v1(3869,1034.13) 3937,966.13 3937,751 v1(3895,709)
  Bottom Layer w7: v1(3869,1034.13) 3869,1024.13 3923.13,970 3944.87,970 3961.02,986.16 OB8.D2@3961.02,1016.14
OB_D_B67: OB8.D3 S4.DATA3 V8.OVL3 | length 1506.7
  Top Layer w7: S4.DATA3@3973.62,677.24 4000,677.24 4011.5,665.74 4011.5,660 4027.5,644 4065.51,644 v1(4098.76,677.24) ; v1(3987,1414) 3987.2,1413.8 V8.OVL3@3987.2,1308.86
  Mid-Layer 1 w7: v1(3986.61,1120.61) 3991,1125 3991,1410 v1(3987,1414)
  Mid-Layer 2 w7: v1(3986.61,1120.61) 4018,1152 4066,1152 4118,1100 4118,937.52 4040,859.52 4040,830.48 4053.48,817 4197.5,817 4205,809.5 4205,763.49 4174.51,732.99 4129.5,732.99 4098.76,702.25 v1(4098.76,677.24)
  Bottom Layer w7: OB8.D3@3986.61,1016.14 v1(3986.61,1120.61)
OB_D_B68: OB8.D4 S4.DATA4 V8.OVL4 | length 1553.6
  Top Layer w7: v1(3915,583) 3915.24,582.76 S4.DATA4@3973.62,582.76 ; V8.OVL4@4012.8,1308.86 4012.8,1190.2 v1(4020,1183)
  Mid-Layer 2 w7: v1(3915,583) 3955,623 3955,1138 4000,1183 v1(4020,1183)
  Bottom Layer w7: OB8.D4@4012.2,1016.14 4012.2,938.8 4076.08,874.92 4080.78,874.92 4085.7,870 4170,870 4225.5,925.5 4225.5,1022 4137.41,1110.09 4092.91,1110.09 v1(4020,1183)
OB_D_B69: OB8.D5 S4.DATA5 V8.OVL5 | length 977.1
  Top Layer w7: S4.DATA5@3973.62,551.26 4032.74,551.26 v1(4033,551) ; v1(4037.8,1121.02) 4062,1145.23 4062,1222 4038.39,1245.61 V8.OVL5@4038.39,1308.86
  Mid-Layer 2 w7: v1(4033,551) 3990,594 3990,1034 3997.8,1081.02 v1(4037.8,1121.02)
  Bottom Layer w7: OB8.D5@4037.8,1016.14 v1(4037.8,1121.02)
OB_D_B70: OB8.D6 S4.DATA6 V8.OVL6 | length 1666
  Top Layer w7: v1(3915,520) 3915.24,519.76 S4.DATA6@3973.62,519.76 ; V8.OVL6@4063.98,1308.86 4063.98,1266.3 v1(4083.98,1246.3)
  Mid-Layer 1 w7: v1(4043,953) 4082.85,981.66 4206,1104.81 4206,1260.54 4193.54,1273 4110.68,1273 v1(4083.98,1246.3)
  Mid-Layer 2 w7: v1(3915,520) 3823,612 3823,1112.52 3914.45,1203.98 3978.98,1203.98 4022,1247 4083.27,1247 v1(4083.98,1246.3)
  Bottom Layer w7: v1(4043,953) 4063.39,973.39 OB8.D6@4063.39,1016.14
OB_D_B71: OB8.D7 S4.DATA7 V8.OVL7 | length 1292.8
  Top Layer w7: S4.DATA7@3973.62,488.27 4012.73,488.27 v1(4033,468) ; v1(4050,1414) 4089.57,1374.43 V8.OVL7@4089.57,1308.86
  Mid-Layer 1 w7: v1(4050,1414) 4050,1229 4088.98,1190.02 v1(4088.98,1078.7)
  Mid-Layer 2 w7: v1(4033,468) 4062,497 4062,562.5 4009,615.5 4009,1018.72 4068.98,1078.7 v1(4088.98,1078.7)
  Bottom Layer w7: OB8.D7@4088.98,1016.14 v1(4088.98,1078.7)
OB_D_B72: OB7.D0 S4.DATA8 V7.OVL0 | length 1712.9
  Top Layer w7: V7.OVL0@4284.84,1308.86 4284.84,1413.84 v1(4285,1414) ; S4.DATA8@4426.38,488.27 4360.57,488.27 ; 4360.57,488.27 4340.57,488.27 v1(4328.31,476) 4348.31,476 4360.57,488.27
  Mid-Layer 2 w7: v1(4285,1414) 4374.81,1414 4385,1403.81 4385,1344.2 4384,1343.2 4384,1141 4433,1092 4433,540.69 4368.31,476 v1(4328.31,476) 4296.65,507.65 4296.65,614.65 v1(4361,679)
  Bottom Layer w7: v1(4361,679) OB7.D0@4361.02,783.86
OB_D_B73: OB7.D1 S4.DATA9 V7.OVL1 | length 1206.8
  Top Layer w7: V7.OVL1@4336.02,1308.86 4336.02,1352.02 v1(4356,1372) ; v1(4367.24,540) 4387.47,519.76 S4.DATA9@4426.38,519.76
  Mid-Layer 2 w7: v1(4356,1372) 4301.66,1317.66 4301.66,1134.78 v1(4315.43,1121) 4379,1121 4410.5,1089.5 4410.5,583.26 v1(4367.24,540)
  Bottom Layer w7: v1(4315.43,1121) 4335.43,1101 OB7.D1@4335.43,1016.14
OB_D_B74: OB7.D2 S4.DATA10 V7.OVL2 | length 1353.2
  Top Layer w7: v1(4342,1242) 4361.61,1261.61 V7.OVL2@4361.61,1308.86 ; S4.DATA10@4426.38,551.26 4470.26,551.26 v1(4485,566)
  Bottom Layer w7: v1(4342,1242) 4287,1187 4287,1128 4261,1102 4261,950 ; OB7.D2@4361.02,1016.14 4361.02,984.02 4312,935 4276,935 4261,950 ; v1(4485,566) 4479,572 4236,572 4128,680 4128,729 4147,748 4147,791.52 4261,905.52 4261,950
OB_D_B75: OB7.D3 S4.DATA11 V7.OVL3 | length 926.3
  Top Layer w7: v1(4332,602.76) 4352,582.76 S4.DATA11@4426.38,582.76 ; v1(4366.61,1078.7) 4366.61,1224.61 4387.2,1245.2 V7.OVL3@4387.2,1308.86
  Mid-Layer 2 w7: v1(4332,602.76) 4393,663.76 4393,952.5 4366.61,978.89 v1(4366.61,1078.7)
  Bottom Layer w7: v1(4366.61,1078.7) 4370,1078.7 4386.61,1062.09 OB7.D3@4386.61,1016.14
OB_D_B76: OB7.D4 S4.DATA12 V7.OVL4 | length 1283
  Top Layer w7: v1(4412.8,1183.98) V7.OVL4@4412.8,1308.86 ; S4.DATA12@4426.38,677.24 4485.76,677.24 v1(4505,658)
  Mid-Layer 1 w7: v1(4353.5,927.5) 4427,854 4427,777.5 4440.5,764 4523,758 4523,676 v1(4505,658)
  Mid-Layer 2 w7: v1(4412.8,1183.98) 4464,1132.77 4464,691 4497,658 v1(4505,658)
  Bottom Layer w7: v1(4353.5,927.5) 4412.2,986.2 OB7.D4@4412.2,1016.14
OB_D_B77: OB7.D5 S4.DATA13 V7.OVL5 | length 1449.3
  Top Layer w7: v1(4301.7,688.74) 4321.7,708.74 S4.DATA13@4426.38,708.74 ; V7.OVL5@4438.39,1308.86 4438.39,1352.39 v1(4458,1372)
  Mid-Layer 1 w7: v1(4301.7,688.74) 4239.12,751.32 4239.12,790.08 4144.7,884.5 4144.19,884.5 4117,911.7 4117,970 4136,989 4205,989 4260.97,1044.97 4381.75,1044.97 4457.8,1121.02 4477.8,1121.02 v1(4497.8,1141.02)
  Mid-Layer 2 w7: v1(4458,1372) 4434,1348 4434,1204.82 v1(4497.8,1141.02)
  Bottom Layer w7: OB7.D5@4437.8,1016.14 4437.8,1110 4448.82,1121.02 4480,1121.02 4497.8,1138.82 v1(4497.8,1141.02)
OB_D_B78: OB7.D6 S4.DATA14 V7.OVL6 | length 1361.5
  Top Layer w7: S4.DATA14@4426.38,740.24 4260,740.24 4244,756.24 4244,862.08 4225.5,880.58 4225.5,970 4212.5,983 4160,983 4149,994 4149,1039 4159,1049 4387,1049 4464,1126 v1(4464,1243) V7.OVL6@4463.98,1308.86
  Bottom Layer w7: OB7.D6@4463.39,1016.14 4463.39,1067.39 4504,1108 4515,1108 4527,1120 4527,1160 4464,1223 v1(4464,1243)
OB_D_B79: OB7.D7 S4.DATA15 V7.OVL7 | length 1778.4
  Top Layer w7: v1(4274,781) 4283.27,771.73 S4.DATA15@4426.38,771.73 ; V7.OVL7@4489.57,1308.86 4489.57,1340 4509.57,1360 4524,1360 4545,1339 4545,1094.72 v1(4528.98,1078.7)
  Mid-Layer 2 w7: v1(4274,781) 4267,774 4267,494.56 4316.56,445 4380,445 4455,520 4455,589 4480,614 4511,614 4550.5,653.5 4550.5,912.5 4548.98,914.02 4548.98,1060 4530.28,1078.7 v1(4528.98,1078.7)
  Bottom Layer w7: OB7.D7@4488.98,1016.14 4488.98,1067.68 4490,1067.68 4500,1077.68 4500,1078.7 v1(4528.98,1078.7)
OB_D_B80: OB6.D0 S3.DATA0 V6.OVL0 | length 1161.2
  Top Layer w7: v1(4675,1379) 4684.84,1369.16 V6.OVL0@4684.84,1308.86 ; v1(4700,649) 4700,715 4756.73,771.73 S3.DATA0@4788.62,771.73
  Mid-Layer 2 w7: v1(4660,859) 4660,1091.77 4600.46,1151.31 4600.46,1200.46 4675,1275 v1(4675,1379)
  Bottom Layer w7: v1(4660,859) 4716,859 4762.02,812.98 OB6.D0@4762.02,783.86 4762.02,672.52 4738.5,649 v1(4700,649)
OB_D_B81: OB6.D1 S3.DATA1 V6.OVL1 | length 2643.5
  Top Layer w7: V6.OVL1@4736.02,1308.86 v1(4736,1372) ; S3.DATA1@4788.62,740.24 4881.76,740.24 4924,698 v1(4924,602)
  Mid-Layer 1 w7: v1(4736,1372) 4736,1395 4785,1444 5353,1444 5438,1359 5438,1080.43 5384.99,1027.42 5351.42,1027.42 5145.52,821.52 5145.52,627.52 5120,602 v1(4924,602)
  Mid-Layer 2 w7: v1(4696.43,1176.38) 4716.43,1176.38 4791.56,1251.51 4791.56,1316.44 v1(4736,1372)
  Bottom Layer w7: v1(4696.43,1176.38) 4736.43,1136.38 OB6.D1@4736.43,1016.14
OB_D_B82: OB6.D2 S3.DATA2 V6.OVL2 | length 980.1
  Top Layer w7: v1(4730,689) 4749.74,708.74 S3.DATA2@4788.62,708.74 ; v1(4742,1246) 4761.61,1265.61 V6.OVL2@4761.61,1308.86
  Mid-Layer 2 w7: v1(4730,689) 4730,1014.13 v1(4690,1054.13) 4690,1085.82 4632.82,1143 4632.82,1180 4698.82,1246 v1(4742,1246)
  Bottom Layer w7: v1(4690,1054.13) 4690,994.13 4709.07,975.07 4750.93,975.07 4762.02,986.16 OB6.D2@4762.02,1016.14
OB_D_B83: OB6.D3 S3.DATA3 V6.OVL3 | length 2562.1
  Top Layer w7: V6.OVL3@4787.2,1308.86 4787.2,1387 ; S3.DATA3@4788.62,677.24 4890,677.24 4894,673.24 4894,579.5 4920,553.5 4943.5,553.5 4963,534 v1(4963,420) ; 4787.2,1387 4787.2,1394.2 v1(4807,1414) 4807,1406.8 4787.2,1387
  Mid-Layer 1 w7: v1(4767.61,1078.7) 4787.61,1078.7 4861.91,1153 4940,1153 4964,1177 4964,1218.5 4930.66,1251.84 4930.66,1388.34 4905,1414 v1(4807,1414)
  Mid-Layer 2 w7: v1(4807,1414) 4809,1412 4809,1221 4800,1212 4800,691 4700,591 4700,472 4811,361 4939.5,361 4963,384.5 v1(4963,420)
  Bottom Layer w7: v1(4767.61,1078.7) 4770,1078.7 4787.61,1061.09 OB6.D3@4787.61,1016.14
OB_D_B84: OB6.D4 S3.DATA4 V6.OVL4 | length 1018.5
  Top Layer w7: v1(4730,563) 4749.76,582.76 S3.DATA4@4788.62,582.76 ; V6.OVL4@4812.8,1308.86 4812.8,1183.2 v1(4832,1164)
  Mid-Layer 2 w7: v1(4730,563) 4824.48,657.48 4824.48,1156.48 v1(4832,1164)
  Bottom Layer w7: OB6.D4@4813.2,1016.14 4813.2,1145.2 v1(4832,1164)
OB_D_B85: OB6.D5 S3.DATA5 V6.OVL5 | length 1523.6
  Top Layer w7: S3.DATA5@4788.62,551.26 4847.74,551.26 v1(4848,551) ; V6.OVL5@4838.39,1308.86 v1(4838.39,1372)
  Mid-Layer 1 w7: v1(4848,551) 4817,582 4817,721 4980,884 4980,932.5 5000,952.5 5072,952.5 5110,990.5 5110,1091 5079.98,1121.02 4898.8,1121.02 v1(4878.8,1101.02)
  Mid-Layer 2 w7: v1(4838.39,1372) 4878.8,1331.59 v1(4878.8,1101.02)
  Bottom Layer w7: OB6.D5@4838.8,1016.14 4838.8,1110 4858.8,1121.02 v1(4878.8,1101.02)
OB_D_B86: OB6.D6 S3.DATA6 V6.OVL6 | length 1180.5
  Top Layer w7: S3.DATA6@4788.62,519.76 v1@4919.24,519.76 ; v1(4843.98,1246) 4863.98,1266 V6.OVL6@4863.98,1308.86
  Mid-Layer 2 w7: v1(4843.98,1246) 4861.3,1228.68 4861.3,1152.82 4843.98,1135.5 4843.98,827.03 4860,811 ; v1(4864.39,951.26) 4860,946.88 4860,811 ; v1(4919.26,519.79) 4894,545.05 4894,777 4860,811
  Bottom Layer w7: v1(4864.39,951.26) OB6.D6@4864.39,1016.14
OB_D_B87: OB6.D7 S3.DATA7 V6.OVL7 | length 1291
  Top Layer w7: S3.DATA7@4788.62,488.27 v1(4879.77,488.27) ; V6.OVL7@4889.57,1308.86 v1(4889.57,1375.03)
  Mid-Layer 2 w7: v1(4889.57,1375.03) 4897.98,1366.62 4897.98,1127.12 v1(4946.09,1079)
  Bottom Layer w7: v1(4879.77,488.27) 4942.39,488.27 4974.12,520 4974.12,593.68 5026,645.56 5026,886.37 4962.37,950 4914.98,950 4889.98,975 OB6.D7@4889.98,1016.14 4889.98,1055.2 4913.77,1079 v1(4946.09,1079)
OB_D_B88: OB5.D0 S3.DATA8 V5.OVL0 | length 1256.3
  Top Layer w7: V5.OVL0@5084.84,1308.86 5084.84,1387 v1(5085,1387.16) ; S3.DATA8@5241.38,488.27 5280.27,488.27 v1(5320,528)
  Mid-Layer 1 w7: v1(5174.02,698.98) 5174.02,673.98 v1(5320,528)
  Mid-Layer 2 w7: v1(5085,1387.16) 5044.93,1347.09 5044.93,1126.2 5174.02,997.11 v1(5174.02,698.98)
  Bottom Layer w7: OB5.D0@5154.02,783.86 5154.02,730.48 5174.02,710.48 v1(5174.02,698.98)
OB_D_B89: OB5.D1 S3.DATA9 V5.OVL1 | length 1531.1
  Top Layer w7: V5.OVL1@5136.02,1308.86 v1(5136.02,1381.02) ; v1(5182.47,499.76) 5202.47,519.76 S3.DATA9@5241.38,519.76
  Mid-Layer 1 w7: v1(5128.43,1121.02) 5100.34,1149.12 5064.04,1149.12 4963.66,1249.5 4963.66,1378.5 4968.16,1383 5047,1383 5087.5,1342.5 5126.02,1381.02 v1(5136.02,1381.02)
  Mid-Layer 2 w7: v1(5128.43,1121.02) 5141.46,1108 5228.11,1108 5229,1107.11 5229,546.29 v1(5182.47,499.76)
  Bottom Layer w7: OB5.D1@5128.43,1016.14 5128.43,1053.7 v1(5128.43,1121.02)
OB_D_B90: OB5.D2 S3.DATA10 V5.OVL2 | length 1536.9
  Top Layer w7: v1(5161.61,1226.39) V5.OVL2@5161.61,1308.86 ; S3.DATA10@5241.38,551.26 5284.26,551.26 v1(5320,587)
  Bottom Layer w7: OB5.D2@5154.02,1016.14 5154.02,975 5140,975 5109,944 5109,913 5120,902 5354.04,902 5355.52,900.52 ; v1(5161.61,1226.39) 5177,1211 5250,1211 5274,1235 5376,1235 5415,1196 5415,960 5355.52,900.52 ; v1(5320,587) 5410,677 5410,846.04 5355.52,900.52
OB_D_B91: OB5.D3 S3.DATA11 V5.OVL3 | length 1230.8
  Top Layer w7: v1(5162,582.76) S3.DATA11@5241.38,582.76 ; V5.OVL3@5187.2,1308.86 5187.2,1362.2 v1(5206,1381)
  Mid-Layer 2 w7: v1(5162,582.76) 5209,629.76 5209,1069.32 v1(5199.61,1078.7) 5199.31,1079 5118.41,1079 5061.93,1135.48 5061.93,1236.93 v1(5206,1381)
  Bottom Layer w7: OB5.D3@5179.61,1016.14 5179.61,1068.32 v1@5190,1078.7 ; v1@5199.31,1079 v1@5190,1078.7 ; v1(5199.61,1078.7) v1@5190,1078.7
OB_D_B92: OB5.D4 S3.DATA12 V5.OVL4 | length 1377.6
  Top Layer w7: V5.OVL4@5212.8,1308.86 5212.8,1264.2 ; v1(5233,1244) 5212.8,1264.2 ; S3.DATA12@5241.38,677.24 5277.26,683 5310,683 5414,787 5414,1112.5 5401,1125.5 5301.57,1125.5 5212.8,1214.27 5212.8,1264.2
  Mid-Layer 1 w7: v1(5140,934) 5233,1027 v1(5233,1244)
  Bottom Layer w7: v1(5140,934) 5160,934 5205.2,979.2 OB5.D4@5205.2,1016.14
OB_D_B93: OB5.D5 S3.DATA13 V5.OVL5 | length 1221.5
  Top Layer w7: v1(5096,663.48) 5162.52,730 5192.52,730 5213.78,708.74 S3.DATA13@5241.38,708.74 ; V5.OVL5@5238.39,1308.86 5238.39,1365.39 v1(5258,1385)
  Mid-Layer 1 w7: v1(5096,663.48) 5108.52,676 5108.52,959.52 5163.23,1014.23 5163.23,1133.46 v1(5190.8,1161.02)
  Mid-Layer 2 w7: v1(5190.8,1161.02) 5190.8,1317.8 v1(5258,1385)
  Bottom Layer w7: v1(5190.8,1161.02) 5200,1161.02 5230.8,1130.23 OB5.D5@5230.8,1016.14
OB_D_B94: OB5.D6 S3.DATA14 V5.OVL6 | length 2083.6
  Top Layer w7: S3.DATA14@5241.38,740.24 5318.24,740.24 5396.5,818.5 5396.5,1105.5 5293.53,1106 5209.53,1190 5091.66,1190 5042,1239.66 5042,1406 5057,1421 5266,1421 5288,1399 5288,1371 5263.98,1346.98 V5.OVL6@5263.98,1308.86 5263.98,1232.02 v1(5290,1206)
  Bottom Layer w7: OB5.D6@5256.39,1016.14 5256.39,955.61 5281,931 5359,931 5398,970 5398,1179.5 5370.5,1207 5291,1207 v1(5290,1206)
OB_D_B95: OB5.D7 S3.DATA15 V5.OVL7 | length 1761
  Top Layer w7: v1(5067,804) 5099.27,771.73 S3.DATA15@5241.38,771.73 ; V5.OVL7@5289.57,1308.86 5289.57,1277.91 5342,1225.48 v1(5342,1161)
  Mid-Layer 2 w7: v1(5067,804) 5039.42,776.42 5039.42,675.56 5114,600.98 5114,520 5163,471 5211,471 5271.5,531.5 5271.5,587 5300.5,616 5324.76,616 5380.42,671.66 5380.42,1122.58 v1(5342,1161)
  Bottom Layer w7: OB5.D7@5281.98,1016.14 5281.98,1060.98 5322,1101 5322,1121 5342,1141 v1(5342,1161)
OB_D_B96: OB4.D0 S2.DATA0 V4.OVL0 | length 1447.3
  Top Layer w7: v1(767,1726) 783,1710 783,1595 771.73,1583.73 S2.DATA0@771.73,1501.38 ; v1(1150.32,1662.48) 1150.32,1652.16 1180,1622.48 1262.32,1622.48 ; v1(1158.8,1726) 1262.32,1622.48 ; V4.OVL0@1308.86,1585.16 1274.8,1585.16 1274.8,1610 1262.32,1622.48
  Mid-Layer 1 w7: v1(767,1726) v1(1158.8,1726) ; v1(833.48,1582) 873.96,1622.48 1110.32,1622.48 v1(1150.32,1662.48)
  Bottom Layer w7: OB4.D0@783.86,1508.98 814.98,1508.98 833.48,1527.48 v1(833.48,1582)
OB_D_B97: OB4.D1 S2.DATA1 V4.OVL1 | length 1595.4
  Top Layer w7: v1(728,1330) 740.24,1342.24 S2.DATA1@740.24,1501.38 ; v1(1242,1590) 1242,1571.98 1280,1533.98 V4.OVL1@1308.86,1533.98
  Mid-Layer 2 w7: v1(728,1330) 785,1387 785,1657.5 829.5,1702 863,1702 944,1621 v1(944,1561)
  Bottom Layer w7: v1(944,1561) 970.43,1534.57 OB4.D1@1016.14,1534.57 1049,1534.57 1073.43,1559 1119,1559 1165,1513 1217,1511.5 1217,1400 1228,1389 1264,1389 1276,1401 1276,1556 v1(1242,1590)
OB_D_B98: OB4.D2 S2.DATA2 V4.OVL2 | length 1192.7
  Top Layer w7: S2.DATA2@708.74,1501.38 708.74,1554.74 766,1612 766,1677.5 738,1705.5 738,1745.63 750,1757.63 870.04,1757.63 v1(1098.7,1528.98) ; V4.OVL2@1308.86,1508.39 1351.61,1508.39 v1(1372,1488)
  Mid-Layer 1 w7: v1(1098.7,1528.98) 1331.02,1528.98 v1(1372,1488)
  Bottom Layer w7: OB4.D2@1016.14,1508.98 1078.7,1508.98 v1(1098.7,1528.98)
OB_D_B99: OB4.D3 S2.DATA3 V4.OVL3 | length 988
  Top Layer w7: v1(677,1560) 677.24,1559.76 S2.DATA3@677.24,1501.38 ; v1(1167,1559) 1243.2,1482.8 ; v1(1188.5,1483.39) 1189.09,1482.8 1243.2,1482.8 ; V4.OVL3@1308.86,1482.8 1243.2,1482.8
  Mid-Layer 1 w7: v1(677,1560) 724,1513 1029,1513 1075,1559 v1(1167,1559)
  Bottom Layer w7: OB4.D3@1016.14,1483.39 v1(1188.5,1483.39)
OB_D_B100: OB4.D4 S2.DATA4 V4.OVL4 | length 1000.5
  Top Layer w7: v1(582.76,1442.76) S2.DATA4@582.76,1501.38 ; v1(1163.8,1407.8) 1213.2,1457.2 V4.OVL4@1308.86,1457.2
  Mid-Layer 1 w7: v1(582.76,1442.76) 618.65,1442.76 668.6,1392.81 1148.81,1392.81 v1(1163.8,1407.8)
  Bottom Layer w7: OB4.D4@1016.14,1457.8 1113.8,1457.8 v1(1163.8,1407.8)
OB_D_B101: OB4.D5 S2.DATA5 V4.OVL5 | length 1561.4
  Top Layer w7: v1(491,1560) 531.26,1560 551.26,1540 S2.DATA5@551.26,1501.38 ; v1(1246,1419) 1258.61,1431.61 V4.OVL5@1308.86,1431.61
  Mid-Layer 1 w7: v1(491,1560) 491,1420 501,1410 532.95,1410 554,1431.05 554,1459.74 571.96,1477.7 766.8,1477.7 832.5,1412 933.38,1412 v1(953.58,1432.2)
  Bottom Layer w7: OB4.D5@1016.14,1432.2 v1(953.58,1432.2) 914,1471.79 914,1579 926,1591 1185,1591 1246,1530 v1(1246,1419)
OB_D_B102: OB4.D6 S2.DATA6 V4.OVL6 | length 1183.8
  Top Layer w7: S2.DATA6@519.76,1501.38 519.76,1442.94 v1(520.24,1442.47) ; V4.OVL6@1308.86,1406.02 1355.02,1406.02 v1(1372,1423)
  Mid-Layer 1 w7: v1(520.24,1442.47) 520.24,1472.49 542.45,1494.7 1078.7,1494.7 v1(1078.7,1426.61) 1106.59,1454.5 1340.5,1454.5 v1(1372,1423)
  Bottom Layer w7: OB4.D6@1016.14,1406.61 1058.7,1406.61 v1(1078.7,1426.61)
OB_D_B103: OB4.D7 S2.DATA7 V4.OVL7 | length 1173.4
  Top Layer w7: v1(488.27,1351) S2.DATA7@488.27,1501.38 ; v1(1224,1360.43) 1244,1380.43 V4.OVL7@1308.86,1380.43
  Mid-Layer 1 w7: v1(488.27,1351) 657.45,1351 667.48,1361.02 913.58,1361.02 ; v1(953.58,1321.02) v1@953.58,1325.99 ; v1(1224,1360.43) 1189.57,1326 v1@953.58,1326 ; 913.58,1361.02 v1@953.58,1326 ; 913.58,1361.02 v1@953.58,1325.99
  Bottom Layer w7: v1(953.58,1321.02) 953.58,1350 984.61,1381.02 OB4.D7@1016.14,1381.02
OB_D_B104: OB3.D0 S2.DATA8 V3.OVL0 | length 1051.1
  Top Layer w7: v1(468.27,1108) 488.27,1088 S2.DATA8@488.27,1048.62 ; v1(1164,1165) 1184.16,1185.16 V3.OVL0@1308.86,1185.16
  Mid-Layer 1 w7: v1(468.27,1108) 504.52,1108 545.5,1148.98 826.42,1148.98 v1(846.42,1128.98) 941.28,1128.98 999.31,1187 1142,1187 v1(1164,1165)
  Bottom Layer w7: OB3.D0@783.86,1108.98 835.39,1108.98 846.42,1120 v1(846.42,1128.98)
OB_D_B105: OB3.D1 S2.DATA9 V3.OVL1 | length 3259
  Top Layer w7: v1(497,1151) 519.76,1128.24 S2.DATA9@519.76,1048.62 ; v1(1246.3,1153.98) 1246.3,1147.68 1260,1133.98 V3.OVL1@1308.86,1133.98
  Mid-Layer 2 w7: v1(497,1151) 497,1079.73 476,1058.73 476,823.04 619,680.04 619,571.43 842.43,348 1037,348 1063,374 1063,678 1075,690 1150.5,690 1161,679.5 1161,646.5 1175.5,632 1175.5,528.5 1218,486 1251,486 1272,507 1272,1188 v1(1246,1214)
  Bottom Layer w7: OB3.D1@1016.14,1134.57 1034,1134.57 1055.43,1156 ; v1(1246,1214) 1242,1210 1109.43,1210 1055.43,1156 ; v1(1246.3,1153.98) 1207.98,1153.98 1190.5,1136.5 1135.5,1136.5 1116,1156 1055.43,1156
OB_D_B106: OB3.D2 S2.DATA10 V3.OVL2 | length 1064.8
  Top Layer w7: v1(551,1108) 551.26,1107.74 S2.DATA10@551.26,1048.62 ; V3.OVL2@1308.86,1108.39 1340.39,1108.39 v1(1372,1140)
  Mid-Layer 1 w7: v1(551,1108) 590,1069 1038.72,1069 v1(1078.7,1108.98)
  Bottom Layer w7: OB3.D2@1016.14,1108.98 v1(1078.7,1108.98) 1110,1108.98 1120.02,1119 1351,1119 v1(1372,1140)
OB_D_B107: OB3.D3 S2.DATA11 V3.OVL3 | length 2585.4
  Top Layer w7: v1(322,1243) 539.76,1243 582.76,1200 S2.DATA11@582.76,1048.62 ; v1(1184,1026) 1240.8,1082.8 V3.OVL3@1308.86,1082.8
  Mid-Layer 1 w7: v1(322,1243) 371,1292 643.74,1292 712.74,1223 1170.5,1223 1213,1180.5 1213,1055 v1(1184,1026)
  Bottom Layer w7: OB3.D3@1016.14,1083.39 983.61,1083.39 952,1051.77 952,909.17 964.5,896.67 964.5,835.5 982,818 1005.63,818 1022.63,835 1159,835 1275,951 1275,1050 1261,1064 1222,1064 v1(1184,1026)
OB_D_B108: OB3.D4 S2.DATA12 V3.OVL4 | length 1115.6
  Top Layer w7: v1(672,1107) 677.24,1101.76 S2.DATA12@677.24,1048.62 ; V3.OVL4@1308.86,1057.2 1369.8,1057.2 v1(1389.59,1077)
  Mid-Layer 1 w7: v1(672,1107) 692,1087 970.94,1087 1036.94,1153 1085.82,1153 1141.02,1097.8 v1(1141.02,1077.8)
  Bottom Layer w7: OB3.D4@1016.14,1057.8 1101.02,1057.8 1131.02,1087.8 1141.02,1097.8 ; v1(1141.02,1077.8) 1141.02,1097.8 ; v1(1389.59,1077) 1368.8,1097.8 1141.02,1097.8
OB_D_B109: OB3.D5 S2.DATA13 V3.OVL5 | length 1223
  Top Layer w7: v1(611,961) 651,961 708.74,1018.74 S2.DATA13@708.74,1048.62 ; v1(1241.61,1031.61) V3.OVL5@1308.86,1031.61
  Mid-Layer 1 w7: v1(611,961) 632,940 901.13,940 v1(994.13,847)
  Bottom Layer w7: v1(994.13,847) 994.13,877 ; OB3.D5@1016.14,1032.2 986.34,1032.2 974.13,1020 974.13,913.5 994.13,893.5 994.13,877 ; v1(1241.61,1031.61) 1241.61,973.55 1199.07,931 1141,931 1087,877 994.13,877